# EAGLE board lid (EAGLE 9.6.2)

Size 100 x 80 mm. Coordinates in mm from the lower left corner, seen from the top.
Outline: 0,0 100,0 100,80 0,80 0,0
Copper layers (1*16): Top 0.035mm / dielectric 1.5mm / Bottom 0.035mm
Design rules "default": minimum track width 6mil, minimum drill 0.35mm, track to track 6mil, track to pad 6mil, pad to pad 6mil, via to via 6mil, smd to smd 6mil, copper to edge 40mil, drill to drill 6mil, minimum pad ring 10mil, minimum via ring 8mil, stop-mask expansion 4mil, vias tented up to drill 0mil, thermal gap 10mil

## Footprints (pad centres in the part's own frame; a part is rotated, then mirrored left to right if it is on the bottom)
TACTILE_SWITCH_PTH_6.0MM = drill 1.016 pad 1.88: 1 -3.251,2.261; 2 3.251,2.261; 3 -3.251,-2.261; 4 3.251,-2.261
DO41-10 = drill 1.118 pad 1.93: A 5.08,0; C -5.08,0
1X01 = drill 1.016 pad 1.93 octagon: 1 0,0
1X02 = drill 1.016 long: 1 -1.27,0; 2 1.27,0
1X04 = drill 1.016 long: 1 -3.81,0; 2 -1.27,0; 3 1.27,0; 4 3.81,0
LED5MM = drill 0.813 pad 1.676 octagon: A -1.27,0; K 1.27,0
TO220V = drill 1.016 long: 1 -2.54,-2.54; 2 0,-2.54; 3 2.54,-2.54
0207/10 = drill 0.813 pad 1.676 octagon: 1 -5.08,0; 2 5.08,0
MA05-1 = drill 1.016 long: 1 -5.08,0; 2 -2.54,0; 3 0,0; 4 2.54,0; 5 5.08,0
WEMOS-D1-MINI = drill 1: JP1.1 -11.43,9.525; JP1.2 -11.43,6.985; JP1.3 -11.43,4.445; JP1.4 -11.43,1.905; JP1.5 -11.43,-0.635; JP1.6 -11.43,-3.175; JP1.7 -11.43,-5.715; JP1.8 -11.43,-8.255; JP2.1 11.43,9.525; JP2.2 11.43,6.985; JP2.3 11.43,4.445; JP2.4 11.43,1.905; JP2.5 11.43,-0.635; JP2.6 11.43,-3.175; JP2.7 11.43,-5.715; JP2.8 11.43,-8.255

## Placement (x,y rotation side)
ACTION  MOMENTARY-SWITCH-SPST-PTH-6.0MM  [TACTILE_SWITCH_PTH_6.0MM]  44.45,6.35 0 top
ACTION1  MOMENTARY-SWITCH-SPST-PTH-6.0MM  [TACTILE_SWITCH_PTH_6.0MM]  29.21,6.35 0 top
D1  1N4004  [DO41-10]  50.8,58.42 0 top
JP1  [1X01]  54.61,63.5 0 top
JP3  [1X02]  7.62,57.15 0 top
JP4  [1X04]  26.67,57.15 0 top
LED1  [LED5MM]  35.56,58.42 0 top
Q1  IRL540  [TO220V]  71.12,63.5 0 top
R1  1K  [0207/10]  45.72,63.5 0 top
R4  10K  [0207/10]  33.02,63.5 0 top
S1  MOMENTARY-SWITCH-SPST-PTH-6.0MM  [TACTILE_SWITCH_PTH_6.0MM]  13.97,27.94 0 top
S2  MOMENTARY-SWITCH-SPST-PTH-6.0MM  [TACTILE_SWITCH_PTH_6.0MM]  15.24,16.51 0 top
SV1  [MA05-1]  15.24,50.8 0 top
USB/PWR  [1X02]  13.97,57.15 0 top
W1  WEMOS-D1-MINI  [WEMOS-D1-MINI]  82.55,20.32 90 top

## Library data of the parts
ACTION ACTION1 S1 S2 = SparkFun-Switches; PROD_ID: SWCH-08441; SF_SKU: COM-00097
D1 JP1 LED1 Q1 R1 R4 = adafruit
JP3 JP4 USB/PWR = pinhead
SV1 = con-lstb; OC_FARNELL: unknown; OC_NEWARK: unknown
W1 = diy-modules

## Nets
0: ACTION1.3 ACTION.3 JP4.1 JP4.4 Q1.3 R1.2 R4.1 S1.3 S2.3 SV1.1 SV1.4 W1.JP2.7
3V3: W1.JP1.8
N$1: Q1.1 R4.2 SV1.2 W1.JP2.5
N$2: D1.C JP3.1 Q1.2
N$3: D1.A JP3.2 SV1.5 USB/PWR.2
N$4: S1.1 W1.JP2.4
N$5: S2.1 W1.JP2.3
N$6: LED1.A W1.JP1.7
N$7: LED1.K R1.1
N$8: USB/PWR.1 W1.JP2.8
N$9: ACTION.1 JP1.1 W1.JP2.6
N$10: JP4.2 W1.JP1.4
N$11: JP4.3 W1.JP1.5
N$12: ACTION1.1 W1.JP1.6

## Tracks (layer width: path | path; a pad name or v marks a point on that pad's centre or on a via)
0  (11 unrouted)
N$1  (3 unrouted)
N$2  (2 unrouted)
N$3  (3 unrouted)
N$4  (1 unrouted)
N$5  (1 unrouted)
N$6  (1 unrouted)
N$7  (1 unrouted)
N$8  (1 unrouted)
N$9  (2 unrouted)
N$10  (1 unrouted)
N$11  (1 unrouted)
N$12  (1 unrouted)